# Altium PCB ElemoW12S-01.PcbDoc
Units mm, origin at the board's own origin, x right, y up, seen from the top; angles counter-clockwise.
Board outline 35.32 x 25.21 mm, 2 copper layers (Top Layer, Bottom Layer), stack 1.569 mm thick; 18 components, 34 nets, 122 pads, 52 vias.
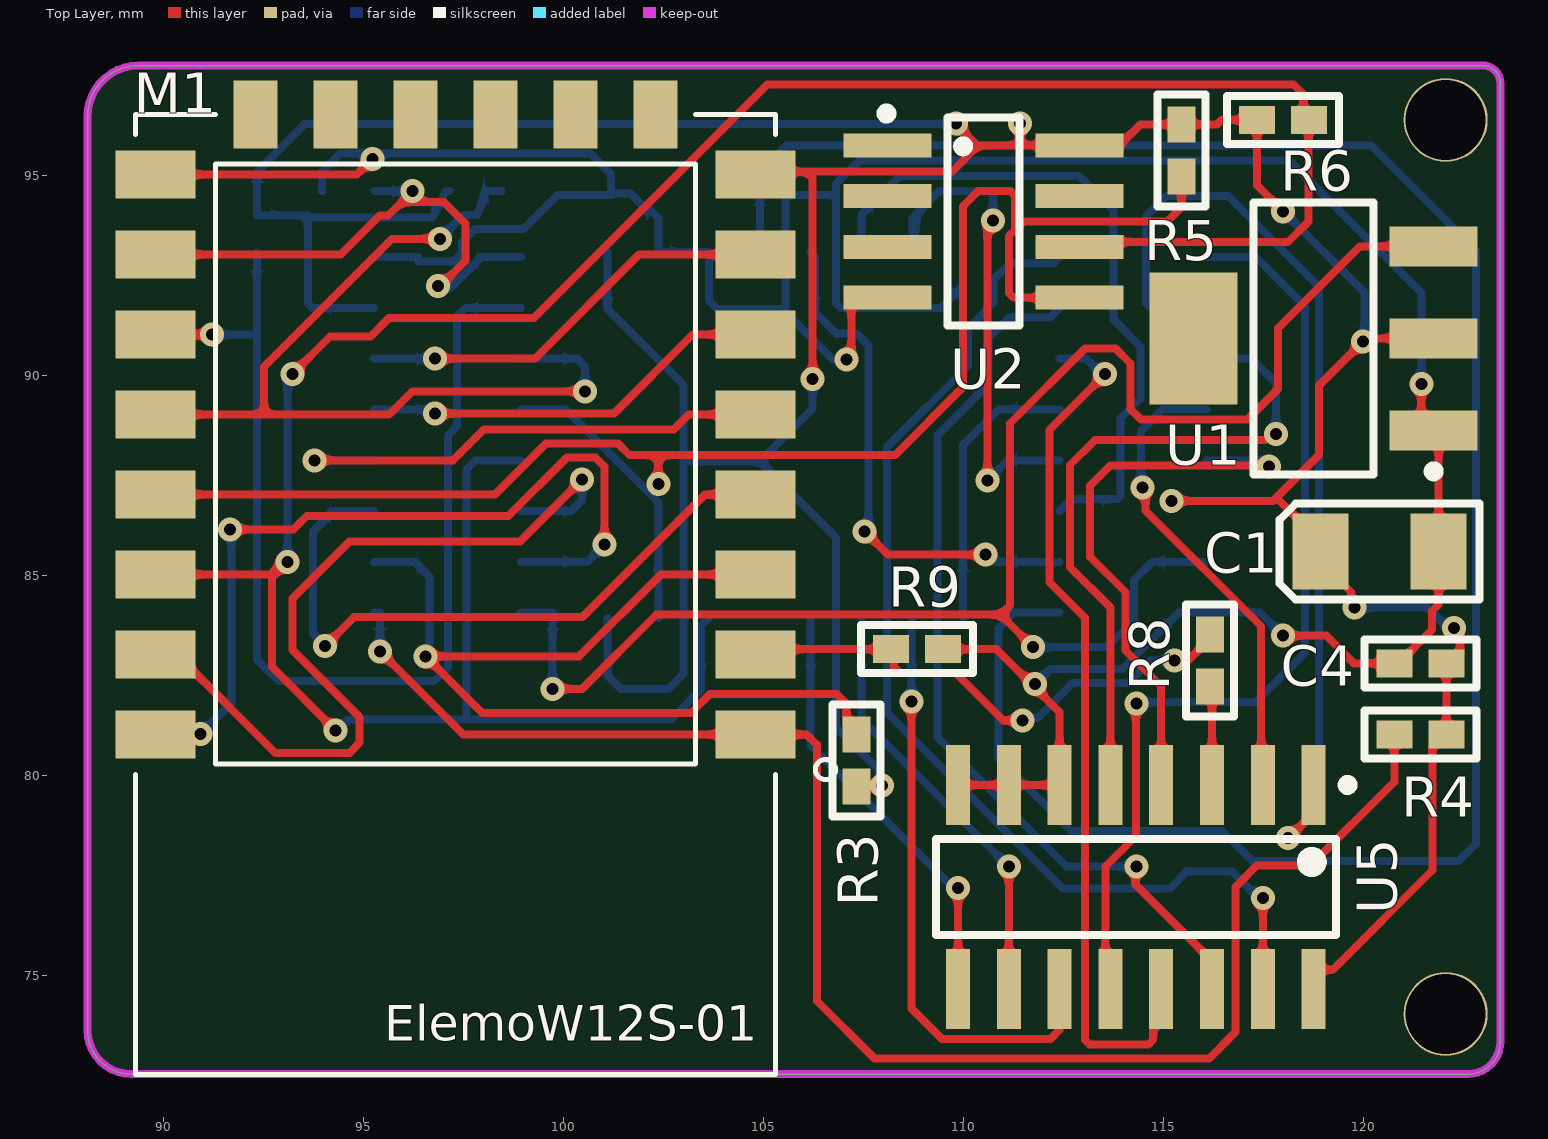
[diagram p0: Top Layer view]
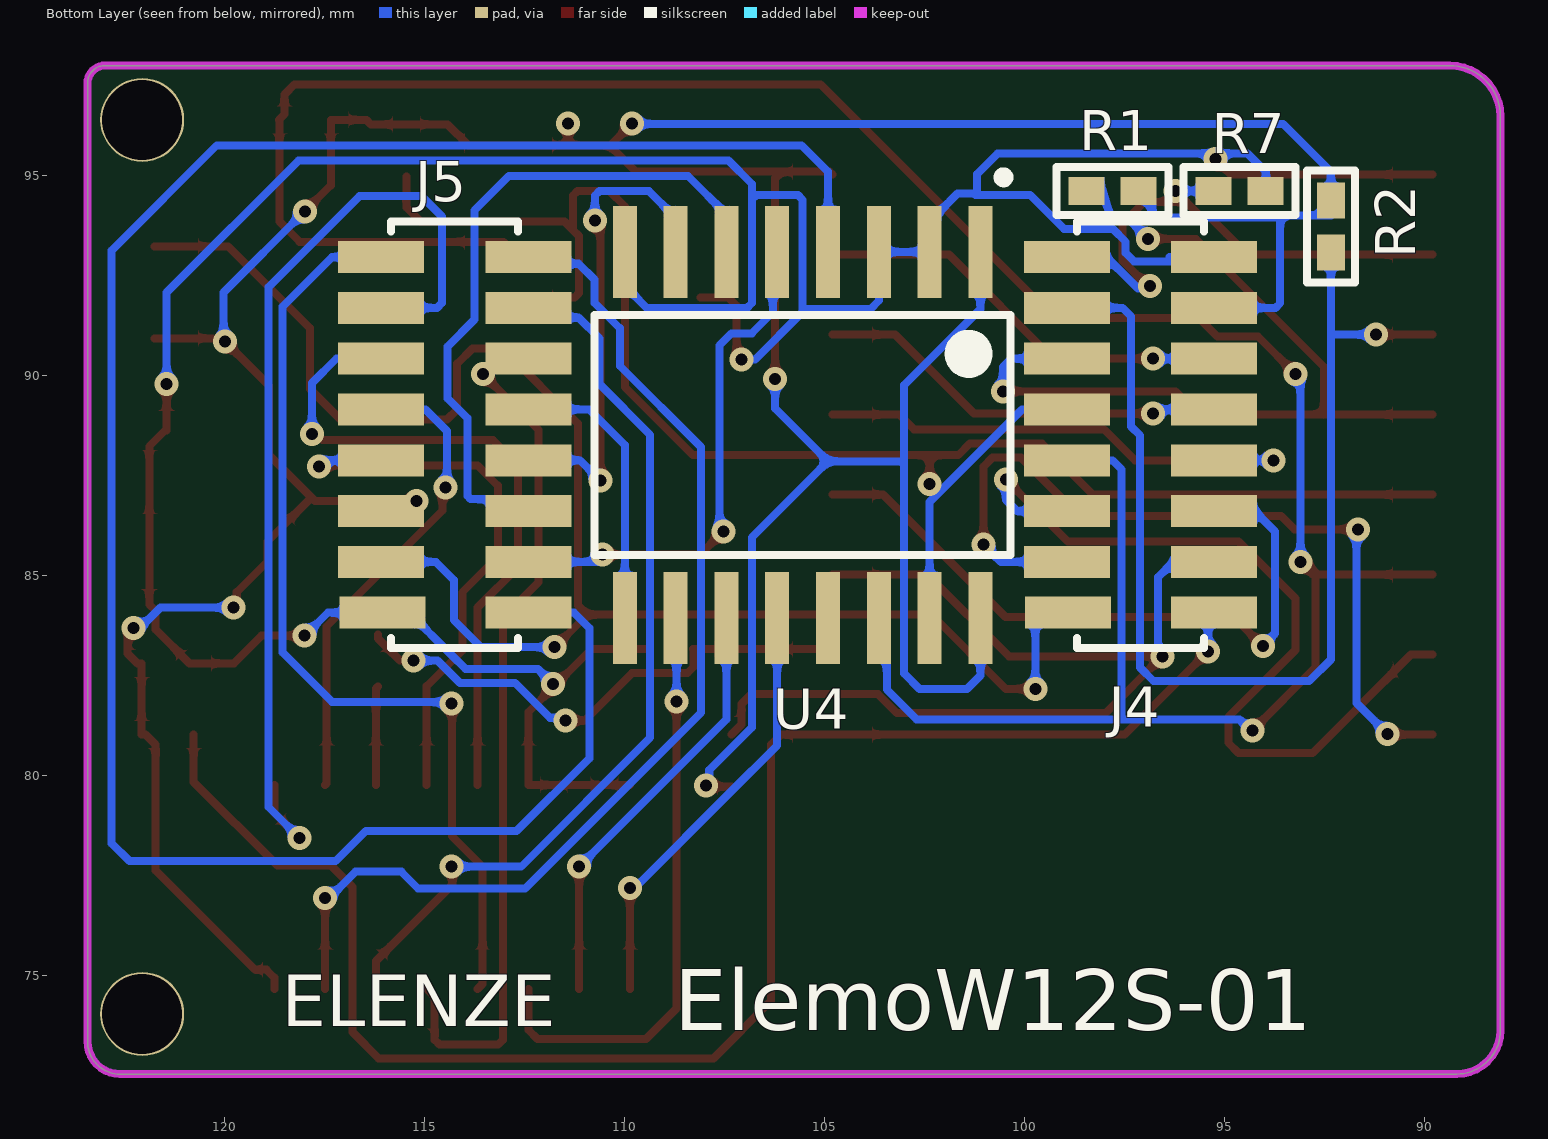
[diagram p1: Bottom Layer view, seen from below]
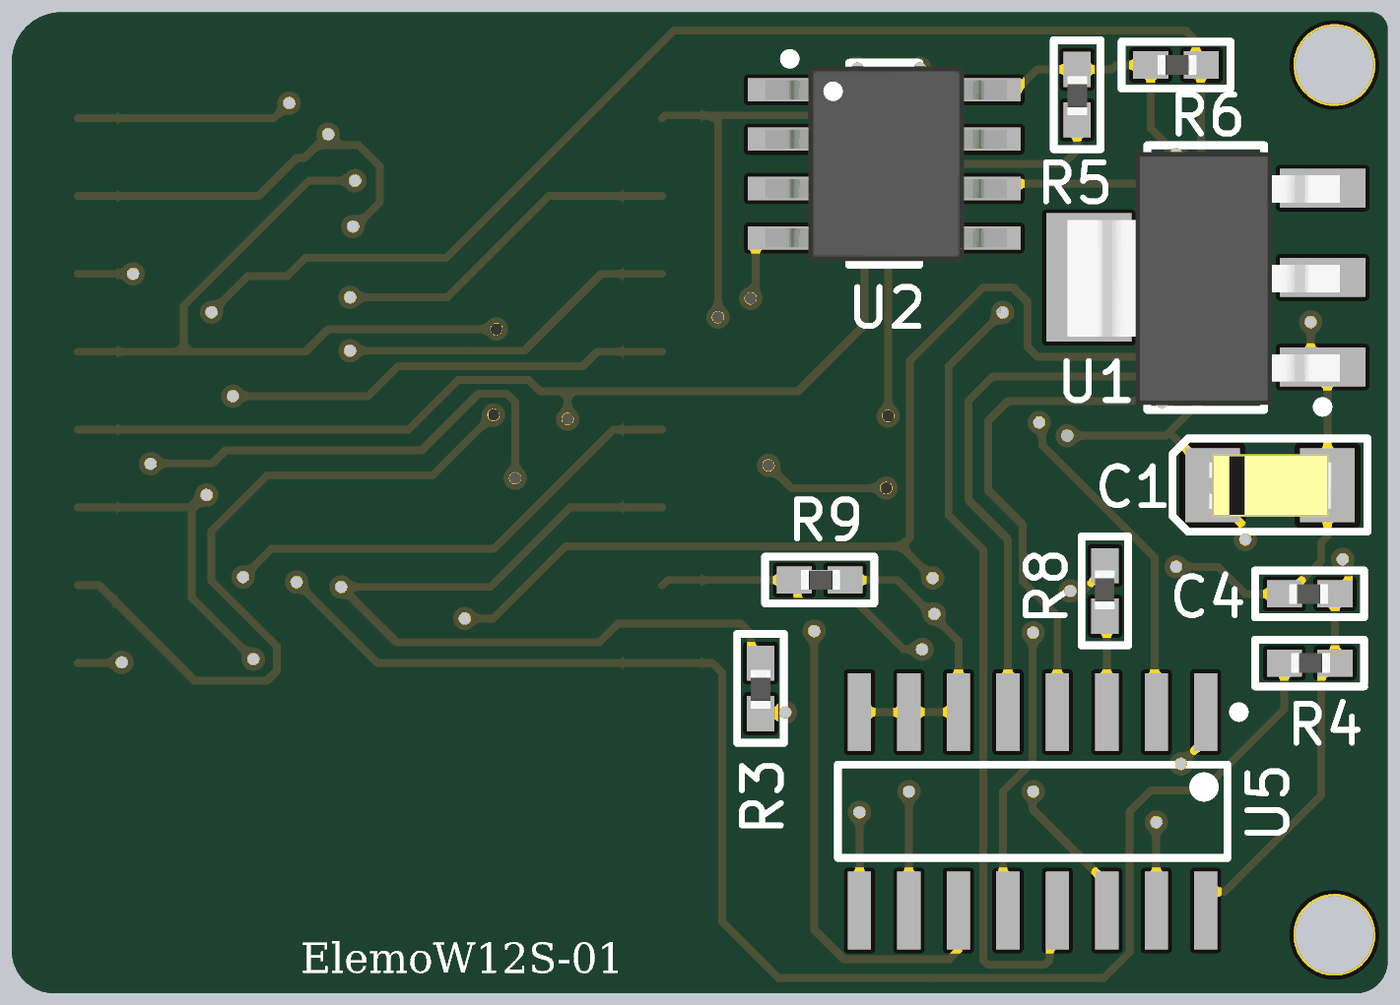
[diagram p2: 3D render of the assembled board from above, using the file's embedded part models]
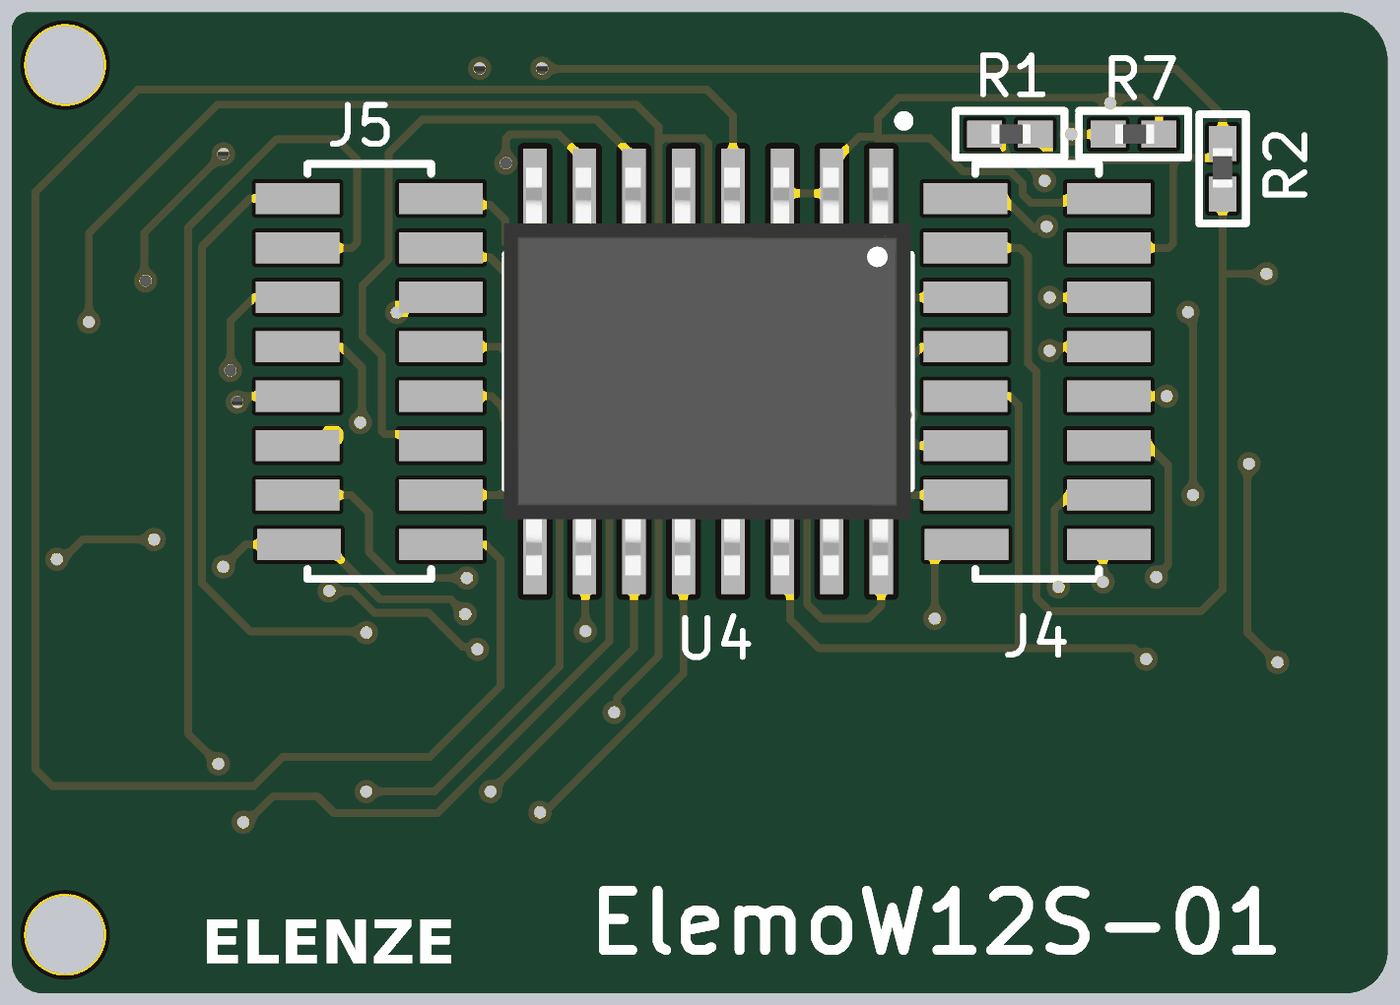
[diagram p3: 3D render of the assembled board from below, using the file's embedded part models]

## Layer stack, top to bottom
Top Solder: solder mask 0.0254, SM-001, Dk 4
Top Layer: signal copper 0.035
Dielectric 1: core 1.4986, Core-043, Dk 4.3
Bottom Layer: signal copper 0.035
Bottom Solder: solder mask 0.0254, SM-001, Dk 4

## Board outline
88.093,73.632 ccw(c89.188,73.632) 89.188,72.538 122.6,72.538 ccw(c122.6,73.352) 123.415,73.352 123.415,97.313 ccw(c122.975,97.313) 122.975,97.752 89.363,97.752 89.363,97.75 ccw(c89.363,96.48) 88.093,96.48

## Design rules (kind name [scope] priority, off if disabled: settings)
Clearance [All] p1: gap=0.15 ignorepadtopadclearanceinfootprint=FALSE
Clearance Clearance_2 [All] p2: gap=0.254 ignorepadtopadclearanceinfootprint=FALSE except(0: Arc-Hole Track-Hole SMDPad-Hole THPad-Hole Via-Hole Fill-Hole Poly-Hole Region-Hole Text-Hole)
Clearance Clearance_1 [All] p3: gap=0.254 ignorepadtopadclearanceinfootprint=FALSE except(0: Arc-Hole Track-Hole SMDPad-Hole THPad-Hole Via-Hole Fill-Hole Poly-Hole Region-Hole Text-Hole)
MinimumSolderMaskSliver [All] p1: minsoldermaskwidth=0
PolygonConnect [All] p1: connectstyle=Relief reliefconductorwidth=0.254 reliefentries=4 polygonreliefangle="90 Angle" airgapwidth=0.254
RoutingVias [All] p1: holewidth=0.25 width=0.6 viastyle="Through Hole" minholewidth=0.25 minwidth=0.6 maxholewidth=0.25 maxwidth=0.6
SilkToSilkClearance [All] p1: silktosilkclearance=0
SilkToSolderMaskClearance [IsPad] p1: minsilkscreentomaskgap=0 clearancetoexposedcopper=TRUE
SolderMaskExpansion [All] p1: expansion=0.102 istentingtop=FALSE
Width [All] p1: maxlimit=0.2 minlimit=0.2 preferedwidth=0.2 minimp=50.000000 maximp=50.000000 favimp=50.000000
27 further rules are at their usual default settings.

## Classes and differential pairs
component class ElemoW12S-01: C1 C4 J4 J5 M1 R1 R2 R3 R4 R5 R6 R7 R8 R9 U1 U2 U4

## Components (designator, comment, footprint, x,y, rotation, side; value= is the part's Value field where it differs from the comment)
C1 "Cap Pol" 1206P 120.396,85.598 r0 top value=10uF
C4 "Cap" 0402 121.412,82.804 r0 top value=100nF
J4 "2x8 PIN HEADER" HDR_2X8_1.27_SMT 95.25,84.074 r90 bottom
J5 "2x8 PIN HEADER" HDR_2X8_1.27_SMT 112.395,84.074 r90 bottom
M1 "ESP-12E" ESP8266-12E 184.538,151.654 r180 top
R1 "Res" 0402 97.79,94.615 r0 bottom value=10K
R2 "Res" 0402 92.329,93.726 r270 bottom value=10K
R3 "Res" 0402 107.315,80.376 r90 top value=10K
R4 "Res" 0402 121.412,81.026 r180 top value=10K
R5 "Res" 0402 115.443,95.631 r90 top value=4.7K
R6 "Res" 0402 117.983,96.393 r180 top value=4.7K
R7 "Res" 0402 94.615,94.615 r0 bottom value=10K
R8 "Res" 0402 116.155,82.88 r270 top value=10K
R9 "Res" 0402 108.833,83.16 r180 top value=2.2K
U1 "LD1117S33" SOT223_4 118.745,90.932 r180 top
U2 "ATECC608A-SSHDA-T" SO_8N 110.49,93.853 r0 top
U4 "PCF8574T/3" SO_16W 105.537,88.519 r270 bottom
U5 "74HC4051D" SO_16N 114.3,77.216 r270 top

## Footprints (in the part's own frame and the unit in brackets; to place one, negate y for a bottom-side part, rotate by r counter-clockwise, add the part's x,y. Pads: shape width x height; smd on the part's side, far side on the other; paste and mask are expansions set on the pad)
0402 [mm] "Chip Resistor, 2-Leads, Body 1.0x0.5mm, IPC Medium Density"
  rect 0.9x0.7 smd: 1(-0.65,0) 2(0.65,0)
  Top Layer pour cut-out: -0.508,0.889 0.508,0.889 0.508,-0.889 -0.508,-0.889
  silkscreen extent -1.4,-0.6 1.4,0.6, body extent -0.53,-0.25 0.47,0.25, height 0.27
1206P [mm] "Chip Capacitor, 2-Leads, Body 3.2x1.6mm, IPC Medium Density"
  rect 1.4x1.9 smd mask+0.15: 1(-1.475,0) 2(1.475,0)
  Top Layer pour cut-out: -1.143,1.524 -1.143,-1.524 1.143,-1.524 1.143,1.524
  silkscreen extent -2.5,-1.2 2.5,1.2, body extent -1.6,-0.81 1.6,0.79, height 1.61
ESP8266-12E [mm]
  rect 2x1.2 smd: 1(79.749,70.627) 2(79.749,68.627) 3(79.749,66.627) 4(79.749,64.627) 5(79.749,62.627) 6(79.749,60.627) 7(79.749,58.627) 8(79.749,56.627) 15(94.749,56.627) 16(94.749,58.627) 17(94.749,60.627) 18(94.749,62.627) 19(94.749,64.627) 20(94.749,66.627) 21(94.749,68.627) 22(94.749,70.627)
  rect 1.1x1.7 smd: 9(82.249,55.127) 10(84.249,55.127) 11(86.249,55.127) 12(88.249,55.127) 13(90.249,55.127) 14(92.249,55.127)
  silkscreen extent 77.75,55.13 95.25,79.13, body extent 79.25,55.18 95.25,79.18, height 3
HDR_2X8_1.27_SMT [mm]
  rect 0.8x2.15 smd: 1(0,0) 2(0,3.65) 3(1.27,0) 4(1.27,3.683) 5(2.54,0) 6(2.54,3.683) 7(3.81,0) 8(3.81,3.683) 9(5.08,0) 10(5.08,3.683) 11(6.35,0) 12(6.35,3.683) 13(7.62,0) 14(7.62,3.683) 15(8.89,0) 16(8.89,3.683)
  silkscreen extent -0.89,0.25 9.78,3.43
SO_8N [mm] "SOIC, 8-Leads, Body 5.1x3.9mm (max), Pitch 1.27mm, IPC Medium Density"
  rect 2.2x0.6 smd: 1(-2.4,1.905) 2(-2.4,0.635) 3(-2.4,-0.635) 4(-2.4,-1.905) 5(2.4,-1.905) 6(2.4,-0.635) 7(2.4,0.635) 8(2.4,1.905)
  silkscreen extent -2.55,-2.6 0.9,2.82, body extent -3.05,-2.5 3.15,2.5, height 1.85
SO_16N [mm] "SOIC, 16-Leads, Body 9.9x3.9mm (max), Pitch 1.27mm, IPC Medium Density"
  rect 2x0.6 smd: 1(-2.55,4.445) 2(-2.55,3.175) 3(-2.55,1.905) 4(-2.55,0.635) 5(-2.55,-0.635) 6(-2.55,-1.905) 7(-2.55,-3.175) 8(-2.55,-4.445) 9(2.55,-4.445) 10(2.55,-3.175) 11(2.55,-1.905) 12(2.55,-0.635) 13(2.55,0.635) 14(2.55,1.905) 15(2.55,3.175) 16(2.55,4.445)
  silkscreen extent -2.67,-5 1.2,5.42, body extent -2,-5 2,5, height 1.75
SO_16W [mm] "SOIC, 16-Leads, Body 10.3x7.5mm (max), Pitch 1.27mm, IPC Medium Density"
  rect 2.3x0.6 smd mask+0.15: 1(-4.575,4.445) 2(-4.575,3.175) 3(-4.575,1.905) 4(-4.575,0.635) 5(-4.575,-0.635) 6(-4.575,-1.905) 7(-4.575,-3.175) 8(-4.575,-4.445) 9(4.575,-4.445) 10(4.575,-3.175) 11(4.575,-1.905) 12(4.575,-0.635) 13(4.575,0.635) 14(4.575,1.905) 15(4.575,3.175) 16(4.575,4.445)
  silkscreen extent -6.56,-5.2 3,5.2, body extent -5.24,-5.25 5.24,5.2, height 3.7
SOT223_4 [mm] "SOT223, 4-Leads, Body 6.7x7.3mm (max), Pitch 2.30mm, IPC Medium Density"
  rect 2.2x1 smd: 1(-3,2.3) 2(-3,0) 3(-3,-2.3)
  rect 2.2x3.3 smd: 4(3,0)
  silkscreen extent -3.13,-3.4 1.5,3.45, body extent -3.45,-3.23 3.55,3.27, height 1.65

## Part data
C1: "Polarized Capacitor (Axial)", LatestRevisionDate=17-Jul-2002, LatestRevisionNote="Re-released for DXP Platform.", PackageDescription="Polarized Capacitor; 2 Leads", PackageReference=POLAR0.8, Published=8-Jun-2000, Publisher="Altium Limited"
C4: "Capacitor", LatestRevisionDate=17-Jul-2002, LatestRevisionNote="Re-released for DXP Platform.", PackageDescription="Radial Cap, Thru-Hole; 2 Leads; 0.3 in Pin Spacing", PackageReference=RAD-0.3, Published=8-Jun-2000, Publisher="Altium Limited"
J4 J5: library part HEADER2x8
M1: "ESP-12F WiFi module - developed by Ai-thinker Team"
R1 R2 R3 R4 R5 R6 R7 R8 R9: "Resistor", LatestRevisionDate=17-Jul-2002, LatestRevisionNote="Re-released for DXP Platform.", PackageDescription="Axial Device, Thru-Hole; 2 Leads; 0.3 in Pin Spacing", PackageReference=AXIAL-0.3, Published=8-Jun-2000, Publisher="Altium Limited"
U1: library part LD1117S33CTR, "IC REG LINEAR 3.3V 800MA", Manufacturer=STMicroelectronics, Package=SOT223, Part Number=LD1117S33CTR
U2: "IC AUTHENTICATION CHIP 8SOIC", Package="SO-8 Microchip", Availability=Warning, Check_prices=https://www.snapeda.com/parts/ATECC608A-SSHDA-T/Microchip/view-part/2888503/?ref=eda, MF=Microchip, MP=ATECC608A-SSHDA-T, Price=None, Purchase-URL=https://pricing.snapeda.com/search/part/ATECC608A-SSHDA-T/?ref=eda, SnapEDA_Link=https://www.snapeda.com/parts/ATECC608A-SSHDA-T/Microchip/view-part/2888503/?ref=snap
U4: "I2C IO Expander"
U5: "CMOS ANALOG/DIGITAL MUX/DEMUX"

## Free pads (board coordinates)
  round 2.1 hole 2: 1(122.047,74.041) 1(122.047,96.393)

## Via types
v1: diameter 0.6, hole 0.3, Top Layer to Bottom Layer, tented both sides, 52 vias

## Nets (pads, with @x,y where several pads share a name; then routed paths per layer and width w, separated by ;. In a path a pad name is that pad's centre, name@x,y a point inside that pad or via, vN(x,y) a via of type N, cw(c..) or ccw(c..) an arc to the next point about the centre after c; other vN are vias at no path point)
+3.3VDD: C1.1 C4.2 J4.13 J5.6 M1.8 R1.1 R2.1 R3.1 R4.1 R5.2 R6.2 U1.2 U2.8 U4.1 U4.16 U5.16 | length 110.3
  Top Layer w0.2: M1.8 104.86,95.098 106.07,95.098 ; v1(106.223,89.916) 106.223,94.945 106.07,95.098 ; R3.1 107.92,79.726 v1(107.95,79.756) ; v1(109.804,96.308) 109.804,96.291 110.338,95.758 U2.8 113.894,95.758 114.417,96.281 R5.2 116.332,96.281 116.444,96.393 R6.2 117.333,94.757 v1(117.983,94.107) ; 110.363,95.758 109.703,95.098 106.07,95.098 ; 111.404,95.758 v1(111.404,96.308) ; v1(115.189,86.868) 117.729,86.868 117.792,86.931 ; U5.16 118.745,74.949 118.945,75.149 119.228,75.149 121.712,77.633 121.712,80.776 121.962,81.026 R4.1 C4.2 122.162,82.804 122.412,83.054 122.412,83.584 122.413,83.585 122.306,83.693 v1(122.26,83.693) ; v1(119.761,84.201) 119.684,84.278 119.684,84.585 118.921,85.348 C1.1 118.921,85.848 117.837,86.931 117.792,86.931 ; v1(119.981,90.85) 118.88,89.749 118.88,88.019 117.792,86.931 ; 120.294,90.932 U1.2
  Bottom Layer w0.2: J4.13 93.716,91.694 93.599,91.811 93.599,94.005 ; R1.1 97.053,94.615 96.723,93.958 93.646,93.958 93.599,94.005 ; U4.16 101.092,82.505 101.428,82.169 102.616,82.169 102.997,82.55 102.997,87.757 ; U4.1 101.092,91.669 102.997,89.764 102.997,87.757 ; v1(106.223,89.916) 106.223,89.179 104.902,87.859 ; v1(107.95,79.756) 107.873,79.833 107.873,80.137 106.807,81.204 106.807,85.954 104.902,87.859 ; v1(109.804,96.308) 109.788,96.291 93.523,96.291 92.329,95.098 R2.1 92.329,94.005 93.599,94.005 ; v1(117.983,94.107) 120.015,92.075 120.015,90.816 v1(119.981,90.85) ; v1(119.761,84.201) 121.59,84.201 122.098,83.693 v1(122.26,83.693) ; 102.997,87.757 103.099,87.859 104.902,87.859
+5VDD: J4.2 J5.4 U1.3 | length 42
  Top Layer w0.2: v1(99.72,82.169) 100.457,82.169 102.311,84.023 110.922,84.023 ; v1(111.735,83.21) 110.922,84.023 ; U1.3 119.902,93.232 117.856,91.186 117.856,89.662 117.094,88.9 114.427,88.9 114.173,89.154 114.173,90.297 113.792,90.678 113.03,90.678 111.15,88.798 111.15,84.252 110.922,84.023
  Bottom Layer w0.2: J4.2 99.72,84.074 v1(99.72,82.169) ; v1(111.735,83.21) 113.575,83.21 114.249,83.884 114.249,84.886 114.707,85.344 J5.4
ADC: M1.2 R8.1 R9.2 | length 13.4
  Top Layer w0.2: M1.2 104.922,83.16 R9.2 108.283,83.16 108.26,83.137 108.26,82.72 108.42,82.56 109.803,82.56 110.985,81.378 v1(111.462,81.378) ; v1@115.285,82.88 115.605,82.88 116.155,83.43 R8.1
  Bottom Layer w0.2: v1(111.462,81.378) 111.526,81.441 111.848,81.441 112.722,82.315 114.106,82.315 114.666,82.875 115.261,82.875 v1(115.266,82.88)
AIN0: J5.11 U5.13 | length 22
  Top Layer w0.2: v1(113.53,90.035) 112.141,88.646 112.141,84.836 113.03,83.947 113.03,73.396 113.147,73.279 114.618,73.279 114.735,73.396 114.735,74.466 U5.13
  Bottom Layer w0.2: J5.11 113.058,90.424 113.358,90.124 113.441,90.124 v1(113.53,90.035)
AIN1: J5.13 U5.14 | length 22.8
  Top Layer w0.2: v1(114.316,77.724) 114.316,77.672 114.292,77.647 114.292,77.279 116.205,75.366 U5.14
  Bottom Layer w0.2: J5.13 112.153,91.452 111.137,91.452 110.617,90.932 110.617,89.789 109.347,88.519 109.347,80.95 112.573,77.724 v1(114.316,77.724)
AIN2: J5.15 U5.15 | length 27.8
  Top Layer w0.2: U5.15 v1(117.475,76.937)
  Bottom Layer w0.2: J5.15 112.229,92.798 111.137,92.798 110.744,92.405 110.744,91.821 110.109,91.186 110.109,90.246 108.077,88.214 108.077,81.573 112.476,77.174 115.147,77.174 115.57,77.597 116.713,77.597 117.373,76.937 v1(117.475,76.937)
AIN3: J5.16 U5.12 | length 23.9
  Top Layer w0.2: U5.12 113.538,74.793 113.538,77.724 114.3,78.486 114.3,81.792 v1(114.314,81.806)
  Bottom Layer w0.2: v1(114.314,81.806) 114.347,81.839 117.297,81.839 118.535,83.077 118.535,91.726 117.297,92.964 J5.16
AIN4: J5.14 U5.1 | length 24.9
  Top Layer w0.2: v1(118.11,78.435) 118.745,79.07 U5.1
  Bottom Layer w0.2: J5.14 114.681,91.694 114.554,91.821 114.554,93.98 115.062,94.488 116.611,94.488 118.885,92.214 118.885,79.21 v1(118.11,78.435)
AIN5: J5.12 U5.5 | length 17.1
  Top Layer w0.2: U5.5 113.665,84.201 112.649,85.217 112.649,87.757 113.284,88.392 117.545,88.392 117.697,88.544 v1(117.805,88.544)
  Bottom Layer w0.2: J5.12 117.196,90.424 117.805,89.814 v1(117.805,88.544)
AIN6: J5.10 U5.2 | length 12
  Top Layer w0.2: v1@114.427,87.165 114.546,87.046 114.546,86.622 117.435,83.733 117.435,79.806 U5.2
  Bottom Layer w0.2: v1(114.469,87.207) 114.427,87.249 114.427,88.619 114.962,89.154 J5.10
AIN7: J5.8 U5.4 | length 14.5
  Top Layer w0.2: U5.4 114.935,82.235 114.046,83.124 114.046,84.582 113.157,85.471 113.157,87.249 113.665,87.757 117.602,87.757 v1(117.627,87.732)
  Bottom Layer w0.2: J5.8 117.475,87.884 v1(117.627,87.732)
EIO0: J5.1 U4.4 | length 54.2
  Bottom Layer w0.2: U4.4 104.902,95.098 105.562,95.758 120.183,95.758 122.81,93.131 122.81,78.305 122.367,77.862 117.21,77.862 116.459,78.613 112.687,78.613 110.871,80.429 110.871,83.693 111.252,84.074 J5.1
EIO1: J5.3 U4.5 | length 13.1
  Top Layer w0.2: v1(107.518,86.106) 108.102,85.522 v1(110.541,85.522)
  Bottom Layer w0.2: U4.5 106.283,92.983 106.283,91.583 106.807,91.059 107.315,91.059 107.62,90.754 107.62,86.208 v1(107.518,86.106) ; v1(110.541,85.522) 110.719,85.344 J5.3
EIO2: J5.5 U4.6 | length 17.3
  Bottom Layer w0.2: U4.6 107.442,94.031 108.407,94.996 112.878,94.996 113.741,94.132 113.741,91.401 114.418,90.724 114.418,89.433 113.919,88.934 113.919,86.995 113.838,86.914 112.695,86.914 J5.5
EIO3: J5.7 U4.7 | length 13.4
  Top Layer w0.2: v1(110.592,87.376) 110.592,93.681 110.732,93.822 v1(110.732,93.872)
  Bottom Layer w0.2: v1(110.592,87.376) 111.1,87.884 J5.7 ; v1(110.732,93.872) 110.732,94.498 110.615,94.615 109.383,94.615 U4.7@108.861,94.093 ; U4.7@108.861,94.093 108.712,93.944 U4.7 U4.7@108.861,94.093
EIO4: J5.9 U4.9 | length 7.1
  Bottom Layer w0.2: U4.9 109.982,88.265 110.871,89.154 J5.9
EIO5: U4.10 U5.11 | length 14.9
  Top Layer w0.2: v1(108.69,81.847) 108.69,74.177 109.451,73.416 112.166,73.416 112.395,73.645 U5.11
  Bottom Layer w0.2: v1(108.69,81.847) 108.69,83.922 U4.10
EIO6: U4.11 U5.10 | length 10.8
  Top Layer w0.2: U5.10 v1(111.125,77.724)
  Bottom Layer w0.2: U4.11 107.442,81.407 v1(111.125,77.724)
EIO7: U4.12 U5.9 | length 10.9
  Top Layer w0.2: U5.9 v1(109.855,77.191)
  Bottom Layer w0.2: U4.12 106.172,80.756 107.4,79.528 109.572,77.356 109.581,77.356 109.747,77.191 v1(109.855,77.191)
EN: J4.3 M1.3 R3.2 | length 25
  Top Layer w0.2: M1.3 102.426,85.027 100.381,82.982 v1(96.545,82.982) 97.968,81.559 103.175,81.559 103.657,82.042 106.817,82.042 107.065,81.794 107.065,81.276 R3.2
  Bottom Layer w0.2: J4.3 96.266,85.344 96.647,84.963 96.647,83.299 96.622,83.274 96.622,83.058 v1(96.545,82.982)
GND: C1.2 C4.1 J4.15 J5.2 M1.15 R7.1 R9.1 U1.1 U2.4 U4.2 U4.3 U4.8 U5.6 U5.7 U5.8 | length 88
  Top Layer w0.2: M1.15 94.825,95.027 v1(95.213,95.415) ; v1@107.188,90.634 107.188,91.748 107.388,91.948 U2.4 ; R9.1 110.82,83.16 111.694,82.285 v1(111.775,82.285) ; U5.8 U5.7 U5.6 112.395,81.585 v1@111.735,82.245 ; v1(117.985,83.498) 119.064,83.498 119.757,82.804 C4.1 120.862,82.804 121.71,83.652 121.71,84.12 121.871,84.281 C1.2 121.871,88.232 121.471,88.632 121.437,88.632 v1(121.437,89.789)
  Bottom Layer w0.2: R7.1 93.955,94.615 93.955,95.098 94.412,95.555 100.66,95.555 101.181,95.034 101.181,94.551 ; J4.15 96.361,92.964 96.361,92.858 97.253,92.858 97.461,93.066 97.461,93.346 97.78,93.665 98.999,93.665 99.847,94.513 101.219,94.513 101.181,94.551 ; v1(107.061,90.399) 106.731,90.399 105.537,91.592 ; U4.8 109.982,92.244 109.432,91.694 106.924,91.694 106.807,91.811 106.807,94.396 ; v1(111.775,82.285) 112.154,82.665 113.961,82.665 114.313,83.017 115.37,84.074 J5.2 117.409,84.074 v1(117.985,83.498) ; v1(121.437,89.789) 121.437,92.075 118.135,95.377 107.389,95.377 106.807,94.795 106.807,94.396 ; 101.181,94.551 101.663,94.551 102.071,94.144 102.162,94.144 102.362,93.944 U4.2 U4.3 103.632,91.872 103.835,91.669 105.461,91.669 105.537,91.592 ; 105.537,91.592 105.537,94.396 105.654,94.513 106.69,94.513 106.807,94.396
GPIO0: J4.12 M1.18 R1.2 | length 22.4
  Top Layer w0.2: M1.18 92.507,89.027 ; v1(96.901,93.421) 95.707,93.421 92.507,90.221 92.507,89.027 ; v1(100.533,89.607) 96.215,89.607 95.635,89.027 92.507,89.027
  Bottom Layer w0.2: v1(96.901,93.421) 97.495,94.015 97.834,94.015 98.062,94.615 R1.2 ; J4.12 100.33,90.424 100.533,90.221 v1(100.533,89.607)
GPIO2: J4.14 M1.17 R2.2 | length 28.4
  Top Layer w0.2: M1.17 v1(91.205,91.027)
  Bottom Layer w0.2: v1(91.205,91.027) 92.297,91.027 92.329,91.059 ; R2.2 92.329,91.027 92.329,82.906 92.876,82.359 96.761,82.359 97.104,82.702 97.104,88.507 97.325,88.728 97.325,91.483 97.536,91.694 J4.14
GPIO4: J4.10 M1.19 R5.1 U2.5 U4.15 | length 45.1
  Top Layer w0.2: M1.19 98.283,87.027 99.557,88.301 101.357,88.301 101.647,88.011 102.362,88.011 ; v1(102.362,87.296) 102.362,88.011 ; U2.5 111.242,91.948 111.125,92.065 111.125,93.487 111.282,93.644 ; R5.1 115.443,94.209 115.087,93.853 111.491,93.853 111.282,93.644 ; 102.362,88.011 108.28,88.011 109.982,89.713 109.982,94.234 110.363,94.615 111.165,94.615 111.282,94.498 111.282,93.644
  Bottom Layer w0.2: J4.10 100.051,89.154 102.362,86.843 U4.15
GPIO5: J4.8 M1.20 R6.1 U2.6 U4.14 | length 70
  Top Layer w0.2: M1.20 92.666,85.027 92.983,85.344 v1(93.091,85.344) 92.71,84.963 92.71,82.712 v1(94.294,81.128) ; v1(93.218,90.043) 94.149,90.974 95.165,90.974 95.631,91.44 99.248,91.44 105.09,97.282 118.237,97.282 118.491,97.028 118.491,96.535 R6.1 118.618,96.378 118.618,93.853 118.11,93.345 113.017,93.345 U2.6
  Bottom Layer w0.2: v1(93.091,85.344) 93.091,89.808 93.218,89.935 v1(93.218,90.043) ; v1(94.294,81.128) 94.332,81.128 94.611,81.407 97.536,81.407 ; J4.8 97.79,87.884 97.561,87.655 97.561,81.432 97.536,81.407 ; U4.14 103.432,83.744 103.432,82.15 102.689,81.407 97.536,81.407
GPIO12: J4.9 M1.6 | length 10.4
  Top Layer w0.2: v1(96.774,89.052) 101.251,89.052 103.226,91.027 M1.6
  Bottom Layer w0.2: J4.9 96.672,89.154 v1(96.774,89.052)
GPIO13: J4.11 M1.7 | length 10.6
  Top Layer w0.2: v1(96.774,90.424) 99.276,90.424 101.879,93.027 M1.7
  Bottom Layer w0.2: J4.11 v1(96.774,90.424)
GPIO14: J4.7 M1.5 | length 13
  Top Layer w0.2: v1(93.768,87.884) 97.231,87.884 97.999,88.651 102.748,88.651 103.124,89.027 M1.5
  Bottom Layer w0.2: v1(93.768,87.884) J4.7
GPIO15: J4.16 M1.16 R7.2 | length 14.2
  Top Layer w0.2: M1.16 94.424,93.027 94.954,93.557 95.405,94.008 95.609,94.008 95.936,94.336 ; v1(96.215,94.615) 95.936,94.336 ; v1(96.85,92.244) 96.899,92.293 96.967,92.293 97.536,92.862 97.536,93.802 97.003,94.336 95.936,94.336
  Bottom Layer w0.2: R7.2 v1(96.215,94.615) ; v1(96.85,92.244) 96.918,92.177 97.155,92.177 97.942,92.964 J4.16
GPIO16: J4.5 M1.4 | length 17.1
  Top Layer w0.2: v1(94.031,83.236) 94.759,83.964 100.467,83.964 103.53,87.027 M1.4
  Bottom Layer w0.2: v1(94.031,83.236) 94.031,83.248 93.726,83.553 93.726,86.106 94.234,86.614 J4.5
MUXOUT: R8.2 U5.3 | length 2.5
  Top Layer w0.2: R8.2 116.205,82.18 U5.3
nRST: J4.1 M1.1 R4.2 | length 40.6
  Top Layer w0.2: v1(95.402,83.109) 97.484,81.027 M1.1 106.07,81.027 106.324,80.773 106.324,74.371 107.767,72.929 116.134,72.929 116.792,73.587 116.792,77.216 117.325,77.749 118.669,77.749 120.762,79.843 R4.2
  Bottom Layer w0.2: J4.1 95.402,84.074 v1(95.402,83.109)
RXD0: J4.6 M1.21 | length 21.1
  Top Layer w0.2: M1.21 90.328,83.027 92.786,80.569 94.639,80.569 94.894,80.824 94.894,81.467 93.218,83.143 93.218,84.43 94.64,85.852 98.908,85.852 v1(100.457,87.401)
  Bottom Layer w0.2: J4.6 100.178,86.614 100.457,86.893 v1(100.457,87.401)
TXD0: J4.4 M1.22 | length 21
  Top Layer w0.2: M1.22 M1.22 90.932,81.026 90.932,81.029 v1(90.919,81.043) ; v1@91.654,86.157 93.243,86.157 93.574,86.487 98.612,86.487 100.076,87.951 100.787,87.951 101.016,87.723 v1(101.016,85.776)
  Bottom Layer w0.2: v1(90.919,81.043) 91.694,81.818 91.694,86.108 v1(91.654,86.148) ; J4.4 100.584,85.344 v1(101.016,85.776)
pads on no net: M1.9 M1.10 M1.11 M1.12 M1.13 M1.14 U1.4 U2.1 U2.2 U2.3 U2.7 U4.13

## Keep-outs
Keep-Out Layer:
  lines w0.2: 89.363,97.75 ccw(c89.363,96.48) 88.093,96.48 88.093,73.632 ccw(c89.188,73.632) 89.188,72.538 122.6,72.538 ccw(c122.6,73.352) 123.415,73.352 123.415,97.313 ccw(c122.975,97.313) 122.975,97.752 89.363,97.752

## Silkscreen, mask and mechanical layers (free items; w line width, h text height)
Top Overlay:
  text "ElemoW12S-01" at 95.505,73.066 h1.52
Bottom Overlay:
  text "ElemoW12S-01" at 108.744,73.636 h1.52
  text "ELENZE" at 118.555,73.313 h2.2